# Altium PCB PCB.PcbDoc (part 3 of 3)
Units mm, origin at the board's own origin, x right, y up, seen from the top; angles counter-clockwise.
Board outline 70 x 30 mm, 4 copper layers (Top Layer, Layer 2, Layer 3, Bottom Layer), stack 1.571 mm thick; 89 components, 59 nets, 279 pads, 164 vias.
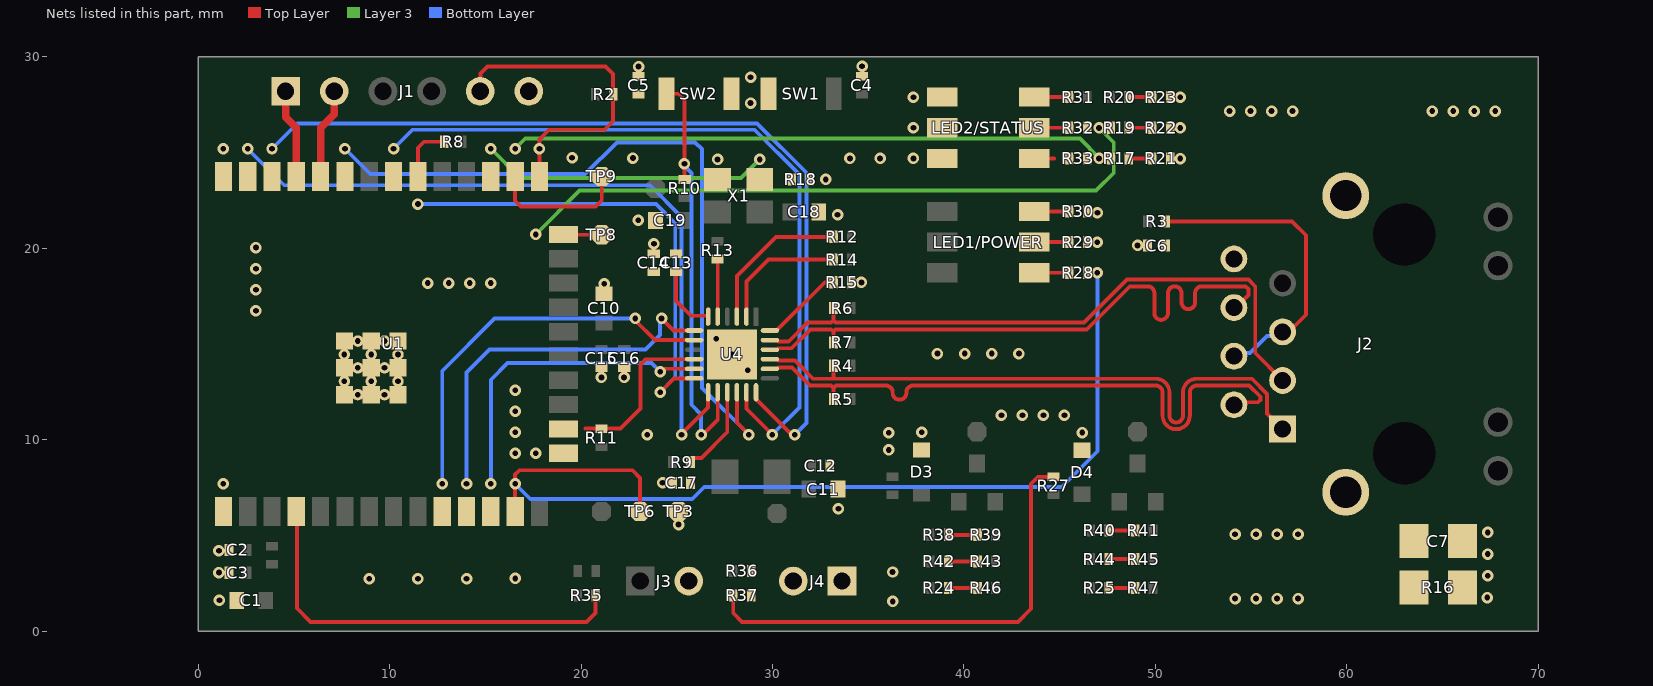
[diagram p4: the nets of this part, all layers, seen from the top]

## Via types
v1: diameter 0.6, hole 0.3, Top Layer to Bottom Layer, tented top, 164 vias

## Nets (pads, with @x,y where several pads share a name; then routed paths per layer and width w, separated by ;. In a path a pad name is that pad's centre, name@x,y a point inside that pad or via, vN(x,y) a via of type N, cw(c..) or ccw(c..) an arc to the next point about the centre after c; other vN are vias at no path point) (continued)
GND: C1.2 C2.1 C3.1 C4.2 C5.2 C6.1 C7.1 C10.1 C11.1 C12.2 C13.1 C14.2 C15.2 C16.2 C17.1 C18.1 C19.1 D3.2 D4.2 J1.6 J2.8 LED2/STATUS.2 LED2/STATUS.4 LED2/STATUS.6 R15.1 R16.1 R18.2 R21.1 R22.1 R23.1 R29.2 R30.2 SW1.1 SW2.1 TP3.1 U1.1 U1.15 U1.38 U1.39 U1.39_10 U1.39_11 U1.39_12 U1.39_13 U1.39_14 U1.39_15 U1.39_16 U1.39_17 U1.39_18 U1.39_19 U1.39_20 U1.39_21 U1.40 U1.41 U1.42 U1.43 U1.44 U1.45 U1.46 U1.47 U4.25 X1.2
  other v1: 36.28,1.549 1.114,1.608 54.163,1.702 55.26,1.702 56.357,1.702 57.455,1.702 67.335,1.753 8.94,2.731 11.48,2.731 14.02,2.731 16.56,2.749 67.361,2.887 1.088,3.056 36.271,3.088 67.361,4.022 1.088,4.199 54.163,5.055 55.26,5.055 56.357,5.055 57.455,5.055 67.361,5.156 25.095,5.568 33.447,6.397 1.32,7.697 24.26,7.749 16.56,9.284 17.633,9.29 36.079,9.462 23.464,10.262 36.079,10.359 46.175,10.368 16.56,10.381 37.793,10.387 41.959,11.278 43.057,11.278 44.154,11.278 45.251,11.278 16.56,11.478 16.56,12.576 21.066,13.25 22.247,13.25 28.711,13.63 27.889,14.453 38.618,14.496 40.037,14.496 41.456,14.496 42.875,14.496 27.067,15.275 3.023,16.739 3.023,17.836 21.209,18.142 11.998,18.18 13.095,18.18 14.193,18.18 15.29,18.18 34.646,18.212 3.023,18.933 3.023,20.031 49.069,20.147 23.811,20.236 46.968,20.312 22.985,21.458 33.399,21.749 46.974,21.849 32.786,23.594 27.131,24.638 34.048,24.689 35.617,24.689 37.363,24.689 51.299,24.681 19.532,24.722 22.714,24.708 1.32,25.197 37.363,26.289 51.299,26.281 53.871,27.165 54.969,27.165 56.066,27.165 57.164,27.165 64.463,27.165 65.56,27.165 66.658,27.165 67.755,27.165 28.854,27.58 37.363,27.889 51.299,27.881 28.854,28.927 23.006,29.489 34.679,29.509
IO0: C5.1 J1.5 R2.1 R10.2 SW2.2 U1.25 U4.14 | length 39.2
  Top Layer w0.203: J1.5@14.732,28.194 14.753,28.215 14.753,29.13 15.113,29.489 21.279,29.489 21.679,29.089 R2.1@21.679,28.044 21.679,26.632 21.234,26.187 18.33,26.187 17.83,25.687 U1.25@17.83,23.75 ; SW2.2@24.462,28.067 25.081,28.067 25.415,27.733 R10.2@25.415,23.594 ; v1(26.275,10.262) 26.374,10.262 27.139,11.027 U4.14@27.139,12.477
  Bottom Layer w0.203: v1(25.4,24.409) 25.4,24.302 25.77,23.932 25.77,11.823 26.275,11.319 v1(26.275,10.262)
  other v1: 17.83,25.197
IO4: R17.2 R33.2 TP9.1 U1.26 | length 38.5
  Top Layer w0.203: U1.26@16.56,23.75 16.56,22.48 16.866,22.174 20.762,22.174 21.082,22.494 TP9.1@21.082,23.749
  Layer 3 w0.203: v1(16.56,25.197) 17.089,25.725 46.053,25.725 47.059,24.72 v1(47.059,24.689)
IO13_RMII_EMAC_RX_ER: R11.1 U1.16 U4.10 | length 8.6
  Top Layer w0.203: 20.236,10.579 21.074,10.579 22.06,10.579 23.114,11.633 23.114,13.92 23.397,14.203 U4.10@25.914,14.203 ; R11.1@21.074,10.566 R11.1@21.163,10.566
IO16_OSC_EN: R18.1 U1.27 X1.1 | length 15.1
  Layer 3 w0.203: v1(15.29,25.197) 16.813,23.673 28.366,23.673 v1(29.331,24.638)
IO18_RMII_MDIO: R8.1 U1.30 U4.12 | length 28.1
  Top Layer w0.203: U1.30@11.48,23.75 11.48,25.244 11.797,25.562 R8.1@12.851,25.562 ; v1(24.139,12.477) 24.864,13.203 U4.12@25.914,13.203
  Bottom Layer w0.203: v1(11.48,22.303) 23.912,22.303 24.924,21.291 24.924,13.262 v1(24.139,12.477)
IO19_RMII_EMAC_TXD0: U1.31 U4.17 | length 39.5
  Top Layer w0.203: U4.17@28.639,12.477 28.639,11.612 v1(29.99,10.262)
  Bottom Layer w0.203: v1(10.21,25.197) 11.201,26.187 29.064,26.187 31.408,23.844 31.408,11.679 v1(29.99,10.262)
IO21_RMII_EMAC_TX_EN: U1.33 U4.16 | length 38.4
  Top Layer w0.203: U4.16@28.139,12.477 28.139,10.881 v1(28.759,10.262)
  Bottom Layer w0.203: v1(7.67,25.197) 8.991,23.876 20.218,23.876 21.869,25.527 25.959,25.527 26.314,25.171 26.314,12.706 v1(28.759,10.262)
IO22_RMII_EMAC_TXD1: U1.36 U4.18 | length 46.6
  Top Layer w0.203: U4.18@29.139,12.477 29.139,12.116 30.994,10.262 v1(31.166,10.262)
  Bottom Layer w0.203: v1(3.86,25.197) 5.181,26.518 29.201,26.518 31.775,23.943 31.775,10.871 v1(31.166,10.262)
IO23_RMII_MDC: U1.37 U4.13 | length 38.3
  Top Layer w0.203: v1(25.254,10.262) 25.254,10.298 26.639,11.683 U4.13@26.639,12.477
  Bottom Layer w0.203: v1(2.59,25.197) 4.498,23.289 23.599,23.289 25.254,21.634 v1(25.254,10.262)
IO25_RMII_EMAC_RXD0: U1.10 U4.8 | length 20.7
  Top Layer w0.203: v1(22.835,16.332) 22.835,16.231 23.863,15.203 U4.8@25.914,15.203
  Bottom Layer w0.203: v1(12.75,7.697) 12.75,13.591 15.491,16.332 v1(22.835,16.332)
IO26_RMII_EMAC_RXD1: U1.11 U4.7 | length 19.6
  Top Layer w0.203: v1(24.206,16.332) 24.836,15.703 U4.7@25.914,15.703
  Bottom Layer w0.203: v1(14.02,7.697) 14.02,13.505 15.222,14.707 23.368,14.707 24.13,15.469 24.13,16.256 v1(24.206,16.332)
IO27_RMII_EMAC_CRS_DV: U1.12 U4.11 | length 16.7
  Top Layer w0.203: v1(24.139,13.546) 24.246,13.546 24.403,13.703 U4.11@25.914,13.703
  Bottom Layer w0.203: v1(15.29,7.697) 15.29,13.129 16.164,14.003 23.682,14.003 v1(24.139,13.546)
"LOW BATT": R28.2 TP6.1 U1.13 | length 51.5
  Top Layer w0.203: U1.13@16.56,6.25 v1(16.56,7.697) 16.56,8.179 16.781,8.4 22.682,8.4 23.089,7.993 TP6.1@23.089,6.25
  Bottom Layer w0.203: v1(16.56,7.697) 17.348,6.909 25.808,6.909 26.435,7.536 45.109,7.536 46.968,9.395 v1(46.968,18.712)
NetC6_2: C6.2 J2.4 J2.5 R3.1 | length 16.4
  Top Layer w0.203: R3.1@50.533,21.4 57.137,21.4 57.861,20.676 57.861,16.523 56.968,15.63 J2.5@56.645,15.63
  Bottom Layer w0.203: J2.4@54.105,14.36 54.277,14.532 54.946,14.532 55.838,15.424 56.439,15.424 J2.5@56.645,15.63
NetC7_2: "J2.Shield 1" "J2.Shield 2" C7.2 R16.2
NetJ4_1: J4.1 R36.2
NetJ4_2: J4.2 R37.2
NetLED1_2: LED1/POWER.2 R28.1 | length 1.8
  Top Layer w0.203: LED1/POWER.2@43.672,18.72 R28.1@45.504,18.72
NetLED1_4: LED1/POWER.4 R29.1 | length 1.8
  Top Layer w0.203: LED1/POWER.4@43.672,20.32 R29.1@45.504,20.32
NetLED1_6: LED1/POWER.6 R30.1 | length 1.8
  Top Layer w0.203: LED1/POWER.6@43.672,21.92 R30.1@45.504,21.92
NetLED2_1: LED2/STATUS.1 R31.1 | length 1.8
  Top Layer w0.203: LED2/STATUS.1@43.675,27.889 R31.1@45.507,27.889
NetLED2_3: LED2/STATUS.3 R32.1 | length 1.8
  Top Layer w0.203: LED2/STATUS.3@43.675,26.289 R32.1@45.507,26.289
NetLED2_5: LED2/STATUS.5 R33.1 | length 1.1
  Top Layer w0.203: LED2/STATUS.5@43.675,24.689 44.705,24.689 ; R33.1@45.507,24.689 R33.1@45.507,24.778
NetR12_1: R12.1 U4.3 | length 8
  Top Layer w0.203: U4.3@28.139,16.428 28.139,18.549 30.185,20.595 R12.1@33.181,20.595
NetR14_1: R14.1 U4.2 | length 6.8
  Top Layer w0.203: U4.2@28.639,16.428 28.639,18.258 29.783,19.401 R14.1@33.181,19.401
NetR15_2: R15.2 U4.24 | length 4.3
  Top Layer w0.203: U4.24@29.865,15.703 30.219,15.703 32.729,18.212 R15.2@33.173,18.212
NetR17_1: R17.1 R21.2 | length 1.2
  Top Layer w0.203: R17.1@48.611,24.689 R21.2@49.835,24.689
NetR19_1: R19.1 R22.2 | length 1.2
  Top Layer w0.203: R19.1@48.611,26.289 R22.2@49.835,26.289
NetR20_1: R20.1 R23.2 | length 1.2
  Top Layer w0.203: R20.1@48.611,27.889 R23.2@49.835,27.889
NetR24_2: R24.2 R46.2 | length 1.5
  Top Layer w0.203: R24.2@39.179,2.261 R46.2@40.703,2.261
NetR25_2: R25.2 R47.2 | length 1.4
  Top Layer w0.203: R25.2@47.561,2.261 R47.2@48.933,2.261
NetR38_1: R38.1 R39.2 | length 1.5
  Top Layer w0.203: R38.1@39.179,5.029 R39.2@40.703,5.029
NetR40_1: R40.1 R41.2 | length 1.4
  Top Layer w0.203: R40.1@47.561,5.258 R41.2@48.933,5.258
NetR42_2: R42.2 R43.2 | length 1.5
  Top Layer w0.203: R42.2@39.179,3.645 R43.2@40.703,3.645
NetR44_2: R44.2 R45.2 | length 1.4
  Top Layer w0.203: R44.2@47.561,3.759 R45.2@48.933,3.759
nRST: C17.2 R9.1 U4.15 | length 4.7
  Top Layer w0.203: R9.1@25.724,8.826 25.724,8.915 25.851,9.042 26.289,9.042 27.639,10.393 U4.15@27.639,12.477
OSCIN: R13.2 U4.5 | length 3
  Top Layer w0.203: R13.2@27.131,19.43 27.139,19.421 U4.5@27.139,16.428
RX_N: J2.6 R7.1 U4.22 | length 33.1
  Top Layer w0.203: U4.22@29.865,14.703 30.235,14.703 30.308,14.775 30.999,14.775 31.986,15.761 33.062,15.761 33.181,15.642 ; R7.1@33.181,15.083 33.181,15.642 ; J2.6@54.105,16.9 54.202,16.9 54.859,17.557 54.859,17.862 54.713,18.009 53.959,18.009 52.434,18.009 ccw(c52.434,17.653) 52.078,17.653 52.078,17.174 cw(c51.722,17.174) 51.367,17.174 51.367,17.653 ccw(c51.011,17.653) 50.656,17.653 50.656,16.614 cw(c50.3,16.614) 49.944,16.614 49.944,17.653 ccw(c49.589,17.653) 49.589,18.009 48.776,18.009 48.661,18.009 46.622,15.969 46.414,15.761 33.3,15.761 33.181,15.642
RX_P: J2.3 R6.1 U4.23 | length 33.1
  Top Layer w0.203: U4.23@29.865,15.203 30.235,15.203 30.308,15.13 30.852,15.13 31.838,16.117 33.062,16.117 33.181,16.236 ; R6.1@33.181,16.874 33.181,16.236 ; J2.3@56.645,13.09 55.215,14.52 55.215,18.01 54.86,18.364 48.514,18.364 46.266,16.117 33.3,16.117 33.181,16.236
RXD: J1.2 U1.34 | length 4.7
  Top Layer w0.381: U1.34@6.4,23.75 6.4,26.289 7.112,27.001 J1.2@7.112,28.194
STDBY: J3.2 R27.1 R35.1 R37.1 U1.4 | length 46.9
  Top Layer w0.203: U1.4@5.13,6.25 5.156,6.224 5.156,1.194 5.867,0.483 20.295,0.483 20.764,0.953 R35.1@20.764,1.866 ; R37.1@27.953,1.866 27.953,0.94 28.41,0.483 42.824,0.483 43.51,1.168 43.51,7.696 43.872,8.058 R27.1@44.679,8.058
TX_N: J2.2 R5.1 U4.20 | length 33.2
  Top Layer w0.203: U4.20@29.865,13.703 30.235,13.703 30.308,13.775 31.019,13.775 31.969,12.825 33.061,12.825 33.181,12.705 33.181,12.587 ; R5.1@33.181,12.116 33.181,12.587 ; J2.2@54.105,11.82 54.238,11.953 55.363,11.953 55.482,12.072 55.482,12.24 54.898,12.824 52.434,12.824 52.154,12.824 ccw(c52.154,12.468) 51.799,12.468 51.799,11.256 cw(c51.087,11.256) 50.376,11.256 50.376,12.468 ccw(c50.021,12.468) 50.021,12.824 48.248,12.824 38.093,12.824 37.347,12.824 ccw(c37.347,12.468) 36.991,12.468 36.991,12.446 cw(c36.636,12.446) 36.28,12.446 36.28,12.468 ccw(c35.924,12.468) 35.924,12.824 35.112,12.824 33.327,12.824 33.183,12.679 33.183,12.589 33.181,12.587
TX_P: J2.1 R4.1 U4.21 | length 33.2
  Top Layer w0.203: U4.21@29.865,14.203 30.235,14.203 30.308,14.13 31.166,14.13 32.116,13.181 33.181,13.181 R4.1@33.181,13.864 ; 33.183,13.179 48.248,13.179 50.021,13.179 cw(c50.021,12.468) 50.732,12.468 50.732,11.256 ccw(c51.087,11.256) 51.443,11.256 51.443,12.468 cw(c52.154,12.468) 52.154,13.179 52.434,13.179 55.045,13.179 55.838,12.387 55.838,11.357 56.048,11.147 J2.1@56.645,10.55
TXD: J1.1 U1.35 | length 4.7
  Top Layer w0.381: J1.1@4.572,28.194 4.572,26.847 5.13,26.289 U1.35@5.13,23.75
VDDCR: C13.2 C14.1 U4.6 | length 3.6
  Top Layer w0.203: C13.2@24.97,18.766 24.97,17.237 25.732,16.475 26.623,16.475 26.639,16.458 U4.6@26.639,16.428
WIFI: R19.2 R32.2 TP8.1 U1.24 | length 36.2
  Top Layer w0.203: U1.24@19.08,20.72 19.099,20.701 TP8.1@21.082,20.701
  Layer 3 w0.203: v1(17.633,20.72) 19.919,23.005 46.907,23.005 47.826,23.925 47.826,25.522 v1@47.059,26.289
  other v1: 47.059,26.281
pads on no net: J2.7 J2.MH1 J2.MH2 U1.6 U1.7 U1.9 U1.17 U1.18 U1.19 U1.20 U1.21 U1.22 U1.28 U1.29 U1.32 U4.4

## Polygon pours and split planes (outlines as drawn)
GND on Top Layer "NONET_L-01_P-001" (solid, pour order 25): 55.257,23.114 55.257,19.117 54.804,18.664 52.324,18.664 52.324,6.858 58.293,6.858 59.309,5.842 60.579,5.842 61.595,6.858 69.723,6.858 69.723,0.254 0.254,0.254 0.254,29.718 69.723,29.718 69.723,23.139 61.676,23.139 60.685,24.13 59.205,24.13 58.189,23.114
GND on Top Layer "NONET_L-01_P-001" (solid, pour order 28): 0.839,22.979 0.859,23 1.77,23 1.77,25.197 0.87,25.197 0.87,23
GND on Top Layer "NONET_L-01_P-001" (solid, pour order 27): 19.851,8.809 19.83,8.829 19.83,9.74 17.633,9.74 17.633,8.84 19.83,8.84
GND on Top Layer "NONET_L-01_P-001" (solid, pour order 26): 0.839,5.479 0.859,5.5 1.77,5.5 1.77,7.697 0.87,7.697 0.87,5.5
AVDD on Top Layer "NONET_L-01_P-001" (solid, pour order 20): 30.841,18.8 31.019,18.622 31.019,17.525 30.867,17.374 29.748,17.374 29.259,16.885 29.259,15.948 29.02,15.948 29.02,17.682 30.138,18.8
AVDD on Top Layer "NONET_L-01_P-001" (solid, pour order 21): 29.504,13.083 30.244,13.083 30.976,12.351 30.976,11.611 32.448,10.139 33.897,10.139 33.972,10.214 33.972,11.1 33.82,11.252 32.742,11.252 30.672,13.322 29.504,13.322
NetC7_2 on Top Layer "NONET_L-01_P-001" (solid, pour order 19): 62.636,2.047 62.636,1.499 62.738,1.397 64.262,1.397 64.262,5.588 62.154,5.588 61.189,6.553 61.189,8.376 60.604,8.96 60.604,21.195 61.468,22.059 61.468,24.181 61.189,24.46 58.674,24.46 58.674,24.452 58.389,24.167 58.389,21.977 59.205,21.16 59.205,8.989 58.674,8.458 58.674,6.01
GND on Top Layer "NONET_L-01_P-001" (solid, pour order 14): 32.758,8.959 33.215,8.959 33.215,8.324 33.678,7.861 33.801,7.861 33.801,5.867 33.069,5.867 33.039,5.897 33.039,7.861 32.758,8.143 32.758,8.324
STDBY on Top Layer "NONET_L-01_P-001" (solid, pour order 8): 20.536,1.549 21.096,1.549 21.12,1.524 21.705,0.94 24.79,0.94 25.399,1.549 28.181,1.549 28.181,2.184 26.897,2.184 26.523,2.557 26.523,3.298 26.352,3.47 24.939,3.47 24.738,3.269 24.738,1.602 24.457,1.321 21.856,1.321 20.993,2.184 20.536,2.184
CHRG on Top Layer "NONET_L-01_P-001" (solid, pour order 7): 20.536,2.829 21.376,2.829 22.339,1.866 23.839,1.866 23.839,3.366 24.282,3.81 27.378,3.81 27.724,3.464 27.724,2.829 28.181,2.829 28.181,3.746 27.813,4.115 22.215,4.115 21.565,3.464 20.536,3.464
+3.3_OUT on Top Layer "NONET_L-01_P-001" (solid, pour order 13): 2.781,3.925 2.985,3.721 4.31,3.721 4.31,2.43 3.924,2.045 3.924,1.156 3.162,1.156 3.162,2.35 2.781,2.731 2.324,2.731 2.324,4.56 2.781,4.56 2.324,4.56 2.781,4.56
NetJ4_1 on Top Layer "NONET_L-01_P-001" (solid, pour order 9): 32.88,1.866 34.38,1.866 34.38,3.366 33.377,4.369 29.451,4.369 28.664,3.581 28.664,2.829 29.121,2.829 29.121,3.464 29.733,4.076 32.229,4.076 32.88,3.425 32.88,3.366
NetJ4_2 on Top Layer "NONET_L-01_P-001" (solid, pour order 10): 28.664,2.184 29.938,2.184 30.169,2.415 30.169,3.299 30.451,3.581 31.84,3.581 32.064,3.357 32.064,1.806 31.807,1.549 28.664,1.549
+3.3_OUT on Layer 3 "NONET_L-01_P-001" (solid, pour order 18): 0.254,0.254 69.723,0.254 69.723,6.858 61.595,6.858 60.579,5.842 59.309,5.842 58.293,6.858 52.324,6.858 52.324,23.114 58.189,23.114 59.205,24.13 60.685,24.13 61.676,23.139 69.723,23.139 69.723,29.718 0.254,29.718
AVDD on Layer 3 "NONET_L-01_P-001" (solid, pour order 15): 50.292,21.234 54.303,25.245 63.267,25.245 65.659,22.853 65.659,8.296 66.377,7.578 68.42,7.578 68.668,7.826 68.668,8.939 68.468,9.139 66.807,9.139 66.548,9.398 66.548,20.244 67.019,20.715 68.492,20.715 68.668,20.891 68.668,22.28 68.45,22.499 67.06,22.499 63.651,25.908 53.991,25.908 49.927,21.844 48.768,21.844 48.641,21.717 48.641,21.234 48.844,21.031 49.581,21.031 49.724,20.888 49.724,17.924 49.174,17.374 31.269,17.374 31.126,17.516 31.126,18.896 30.987,19.034 30.487,19.034 30.345,18.893 30.345,16.937 30.569,16.713 34.061,16.713 34.265,16.51 34.265,12.802 33.68,12.217 32.639,12.217 31.902,11.481 31.902,9.677 29.734,7.509 29.734,6.647 29.985,6.397 32.064,6.397 33.215,7.547 35.052,9.384 35.052,16.51 35.255,16.713 49.454,16.713 50.292,17.551
GND on Layer 2 "NONET_L-01_P-001" (solid, pour order 4): 55.257,23.114 55.257,19.117 54.804,18.664 52.324,18.664 52.324,6.858 58.293,6.858 59.309,5.842 60.579,5.842 61.595,6.858 69.723,6.858 69.723,0.254 0.254,0.254 0.254,29.718 69.723,29.718 69.723,23.139 61.676,23.139 60.685,24.13 59.205,24.13 58.189,23.114

## Other copper
Top Layer:
  rectangle net FULL_LED: 44.361,6.349 44.996,7.314
  rectangle net CHG_LED: 35.954,6.388 36.589,7.353
  rectangle net FULL_LED: 44.336,6.896 44.959,7.353
  rectangle net FULL_LED: 46.393,1.943 46.85,7.162
  rectangle net FULL_LED: 44.336,6.896 46.129,7.353
  rectangle net FULL_LED: 46.167,6.294 48.523,7.214
  rectangle net CHG_LED: 37.785,6.294 40.141,7.214
  rectangle net CHG_LED: 35.954,6.896 37.747,7.353
  rectangle net CHG_LED: 38.011,1.943 38.468,7.162
  rectangle net +3.3_OUT: 20.757,14.714 21.646,16.475
  rectangle net +3.3_OUT: 20.757,14.486 22.573,14.943
  region net GND: 1.841,3.366 1.088,3.366 1.088,2.731 1.841,2.731
  region net GND: 1.841,4.509 1.088,4.509 1.088,3.874 1.841,3.874
  rectangle net GND: 24.842,5.569 25.343,6.404
  rectangle net IO16_OSC_EN: 28.631,22.994 30.031,24.638
  rectangle net ETHERNET: 17.38,5.5 18.28,7.697
  rectangle net "LOW BATT": 16.11,5.5 17.01,7.697
  rectangle net IO27_RMII_EMAC_CRS_DV: 14.84,5.5 15.74,7.697
  rectangle net IO26_RMII_EMAC_RXD1: 13.57,5.5 14.47,7.697
  rectangle net IO25_RMII_EMAC_RXD0: 12.3,5.5 13.2,7.697
  rectangle net CHG_LED: 35.954,6.896 36.577,7.353
  rectangle net IO0: 25.097,23.365 25.732,24.409
  rectangle net GND: 65.278,1.397 67.895,5.588
  rectangle net +3.3_OUT: 28.631,21.005 30.031,22.494
  rectangle net GND: 23.485,19.483 24.12,20.236
  rectangle net +3.3_OUT: 2.14,5.5 3.04,7.697
  rectangle net EN: 3.41,5.5 4.31,7.697
  region net CHG_LED: 10.66,7 9.76,7 9.76,4.803 10.66,4.803
  region net FULL_LED: 19.83,19 19.83,19.9 17.633,19.9 17.633,19
  region net WIFI: 19.83,20.27 19.83,21.17 17.633,21.17 17.633,20.27
  rectangle net IO0: 17.38,23 18.28,25.197
  rectangle net IO4: 16.11,23 17.01,25.197
  region net IO18_RMII_MDIO: 11.93,24.5 11.03,24.5 11.03,22.303 11.93,22.303
  rectangle net IO16_OSC_EN: 14.84,23 15.74,25.197
  rectangle net IO19_RMII_EMAC_TXD0: 9.76,23 10.66,25.197
  rectangle net IO21_RMII_EMAC_TX_EN: 7.22,23 8.12,25.197
  rectangle net IO22_RMII_EMAC_TXD1: 3.41,23 4.31,25.197
  rectangle net IO23_RMII_MDC: 2.14,23 3.04,25.197
  rectangle net +3.3_OUT: 26.82,5.355 28.22,8.969
  rectangle net GND: 26.431,22.994 27.831,24.638
  rectangle net GND: 32.038,21.45 33.41,22.339
  rectangle net +3.3_OUT: 37.363,18.22 39.675,19.22
  rectangle net FL: 37.363,19.82 39.675,20.82
  rectangle net CH: 37.363,21.42 39.675,22.42
  rectangle net GND: 37.363,24.189 39.675,25.189
  rectangle net GND: 37.363,25.789 39.675,26.789
  rectangle net GND: 37.363,27.389 39.675,28.389
  rectangle net NetR40_1: 47.18,4.94 49.162,5.575
  rectangle net NetR44_2: 47.18,3.442 49.162,4.077
  rectangle net NetR25_2: 47.18,1.943 49.162,2.578
  rectangle net NetR38_1: 38.951,4.712 40.932,5.347
  rectangle net NetR42_2: 38.951,3.327 40.932,3.962
  rectangle net NetR24_2: 38.951,1.943 40.932,2.578
  region net GND: 2.019,1.918 1.114,1.918 1.114,1.283 2.019,1.283
  rectangle net +3.3_OUT: 49.784,6.436 50.537,7.071
  rectangle net +3.3_OUT: 41.402,6.436 42.155,7.071
  region net +3.3_OUT: 20.053,2.184 19.3,2.184 19.3,1.549 20.053,1.549
  region net +3.3_OUT: 20.053,3.464 19.3,3.464 19.3,2.829 20.053,2.829
  rectangle net ETH2X_LED1: 33.892,20.277 34.646,20.912
  rectangle net ETH2X_LED2: 33.892,19.084 34.646,19.719
  rectangle net GND: 33.892,17.902 34.646,18.537
  rectangle net GND: 31.713,23.277 32.786,23.912
  region net GND: 23.891,21.767 22.985,21.767 22.985,21.132 23.891,21.132
  region net GND: 25.288,19.483 25.288,19.94 23.485,19.94 23.485,19.483
  region net GND: 21.519,17.389 21.519,18.142 20.884,18.142 20.884,17.389
  rectangle net +3.3_OUT: 13.562,25.244 14.315,25.879
  region net +3.3_OUT: 20.968,28.362 20.215,28.362 20.215,27.727 20.968,27.727
  region net GND: 34.989,28.756 34.989,29.509 34.354,29.509 34.354,28.756
  rectangle net "LOW BATT": 46.215,18.402 46.969,19.037
  region net GND: 38.103,9.462 38.103,10.387 37.468,10.387 37.468,9.462
  region net GND: 46.485,9.444 46.485,10.368 45.85,10.368 45.85,9.444
  region net GND: 21.938,14.003 21.938,13.25 22.573,13.25 22.573,14.003
  region net GND: 20.757,14.003 20.757,13.25 21.392,13.25 21.392,14.003
  region net +3.3_OUT: 20.757,9.855 20.757,9.102 21.392,9.102 21.392,9.855
  region net +3.3_OUT: 25.013,9.144 24.26,9.144 24.26,8.509 25.013,8.509
  region net GND: 25.013,8.059 24.26,8.059 24.26,7.424 25.013,7.424
  rectangle net +3.3_OUT: 41.415,4.712 42.168,5.347
  rectangle net +3.3_OUT: 41.415,3.327 42.168,3.962
  rectangle net +3.3_OUT: 41.415,1.943 42.168,2.578
  rectangle net +3.3_OUT: 49.644,4.94 50.398,5.575
  rectangle net +3.3_OUT: 49.644,3.442 50.398,4.077
  rectangle net +3.3_OUT: 49.644,1.943 50.398,2.578
  rectangle net GND: 50.546,27.571 51.299,28.206
  rectangle net GND: 50.546,25.971 51.299,26.606
  rectangle net GND: 50.546,24.371 51.299,25.006
  rectangle net GND: 46.215,21.602 46.969,22.237
  rectangle net GND: 46.215,20.002 46.969,20.637
  region net GND: 49.822,20.457 49.069,20.457 49.069,19.822 49.822,19.822
  region net AVDD: 49.822,21.718 49.069,21.718 49.069,21.083 49.822,21.083
  rectangle net AVDD: 33.892,11.799 34.646,12.434
  rectangle net AVDD: 33.892,13.547 34.646,14.182
  rectangle net AVDD: 33.892,14.765 34.646,15.4
  rectangle net AVDD: 33.892,16.556 34.646,17.191
  rectangle net GND: 27.452,27.207 30.206,28.927
  rectangle net GND: 22.689,28.756 23.324,29.489
  rectangle net FL: 48.653,8.294 49.473,10.414
  rectangle net CH: 40.271,8.294 41.091,10.414
  rectangle net AVDD: 29.74,6.147 30.74,8.059
  rectangle net EN: 3.543,4.204 4.178,6.25
  rectangle net NetR20_1: 48.382,27.571 50.063,28.206
  rectangle net NetR19_1: 48.382,25.971 50.063,26.607
  rectangle net NetR17_1: 48.382,24.372 50.063,25.007
  rectangle net IO4: 46.218,24.372 47.899,25.007
  rectangle net WIFI: 46.218,25.971 47.899,26.607
  rectangle net ETHERNET: 46.218,27.571 47.899,28.206
  rectangle net NetLED1_2: 43.672,18.403 45.733,19.038
  rectangle net NetLED1_4: 43.672,20.002 45.733,20.637
  rectangle net NetLED1_6: 43.672,21.602 45.733,22.237
  rectangle net NetLED2_5: 43.675,24.372 45.735,25.007
  rectangle net NetLED2_3: 43.675,25.971 45.735,26.607
  rectangle net NetLED2_1: 43.675,27.571 45.735,28.206
  rectangle net NetC6_2: 50.305,19.821 50.762,21.718
  rectangle net AVDD: 29.54,6.83 31.767,8.969
  rectangle net AVDD: 31.515,6.972 32.277,8.959
  rectangle net IO13_RMII_EMAC_RX_ER: 19.08,10.312 21.392,10.846
  rectangle net EN: 33.196,27.816 35.712,28.273
  rectangle net IO0: 21.679,27.816 24.462,28.273
  region net nRST: 25.496,9.144 25.496,7.424 25.953,7.424 25.953,9.144
  rectangle net CLK50M: 25.415,21.294 27.831,22.494
  rectangle net CLK50M: 25.097,21.45 25.732,22.883
  rectangle net VDDCR: 23.486,18.543 25.288,19.003
  rectangle net IO16_OSC_EN: 29.331,23.277 31.231,23.912
  rectangle net +3.3_OUT: 29.331,21.45 31.276,22.339
  rectangle net CLK50M: 26.813,20.141 27.448,21.894

## Silkscreen, mask and mechanical layers (free items; w line width, h text height)
Top Overlay:
  text "BOOT" at 25.231,25.933 h0.51
  text "RESET" at 30.311,25.933 h0.51
  text "TX" at 4.826,25.866 h0.51 r90
  text "RX" at 7.346,25.866 h0.51 r90
  text "EN" at 12.446,25.764 h0.51 r90
  text "IO0" at 15.016,25.326 h0.51 r90
  text "GND" at 17.54,25.331 h0.51 r90
  text "3V3" at 9.906,25.282 h0.51 r90
  text "IO4" at 20.509,24.64 h0.51
  text "CLK50" at 24.192,23.986 h0.51 r90
  text "WIFI" at 20.214,21.664 h0.51
  text "CH" at 40.257,11.278 h0.51
  text "FL" at 48.65,11.284 h0.51
  text "ETH" at 20.397,4.909 h0.51
  text "LB" at 22.665,4.836 h0.51
  text "GND" at 24.513,4.836 h0.51
  text "AVDD" at 29.33,4.793 h0.51
  text "10K" at 36.24,4.775 h0.51
  text "0R" at 42.724,4.775 h0.51
  text "10K" at 44.622,4.775 h0.51
  text "0R" at 50.954,4.775 h0.51
  text "ESP32" at 23.284,4.064 h0.51
  text "TP4056" at 31.022,4.047 h0.51
  text "22R" at 27.721,3.753 h0.51
  text "10K" at 19.695,3.743 h0.51
  text "220K" at 35.897,3.438 h0.51
  text "220K" at 44.279,3.438 h0.51
  text "0R" at 42.724,3.391 h0.51
  text "0R" at 50.954,3.391 h0.51
  text "470K" at 35.917,2.007 h0.51
  text "0R" at 42.724,2.007 h0.51
  text "470K" at 44.299,2.007 h0.51
  text "0R" at 50.954,2.007 h0.51
  text "10K" at 19.716,0.781 h0.51
  text "22R" at 27.773,0.791 h0.51
  text "CHRG" at 22.158,0.548 h0.51
  text "CHRG" at 30.214,0.547 h0.51
  text "STDBY" at 32.445,0.547 h0.51
  text "STDBY" at 24.46,0.531 h0.51
Board Outline:
  the board outline again, w0.254